# Allegro board MODULATION_CHOISUWON1.brd
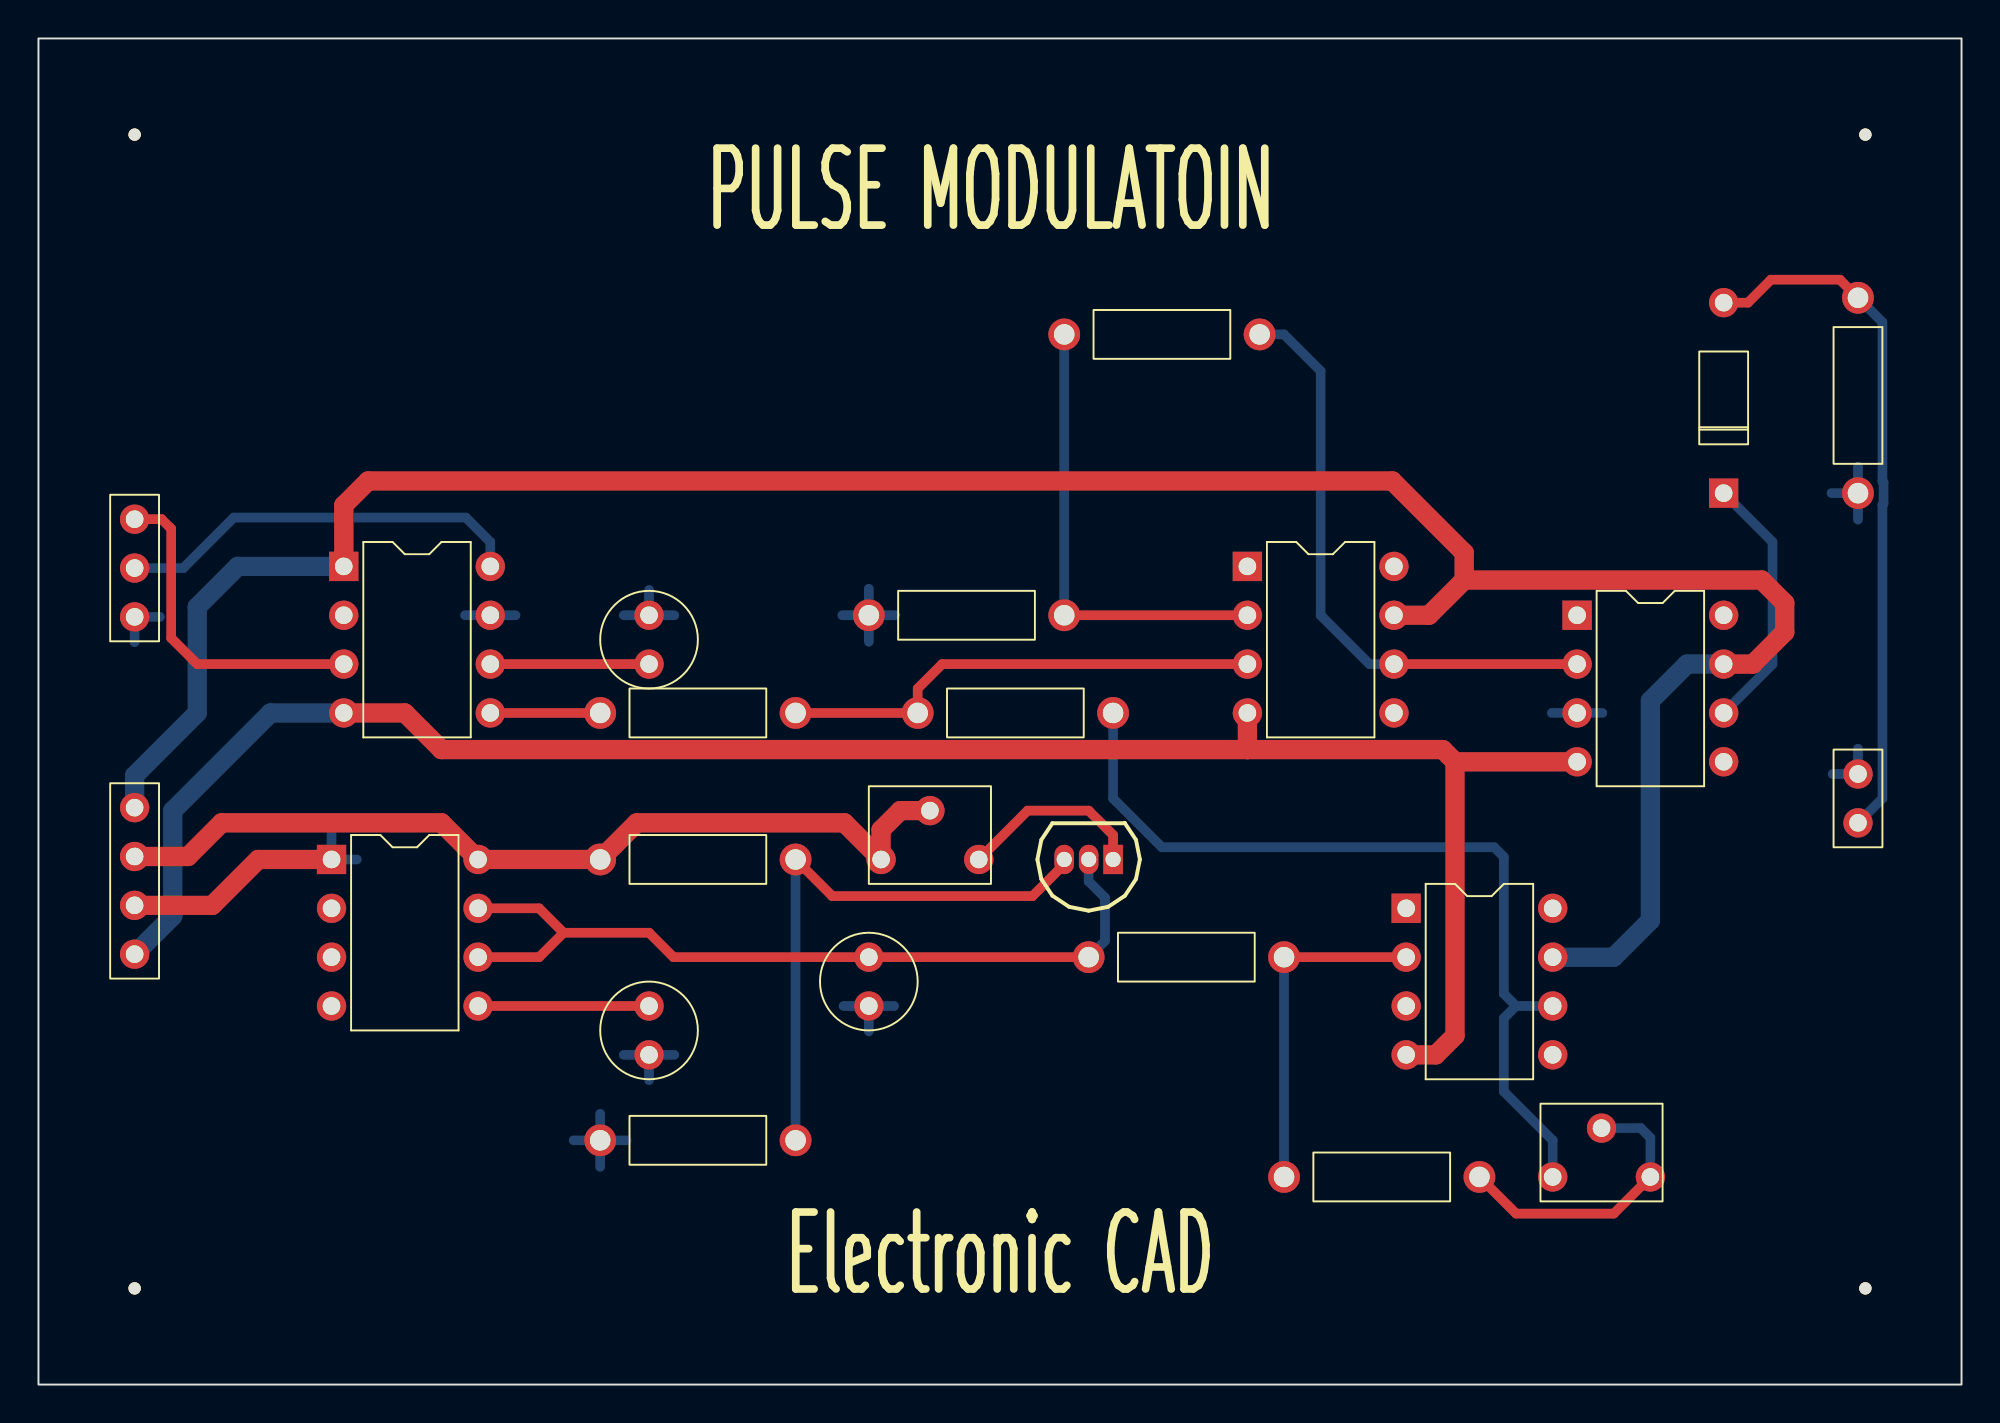
[diagram p0: board, top side]
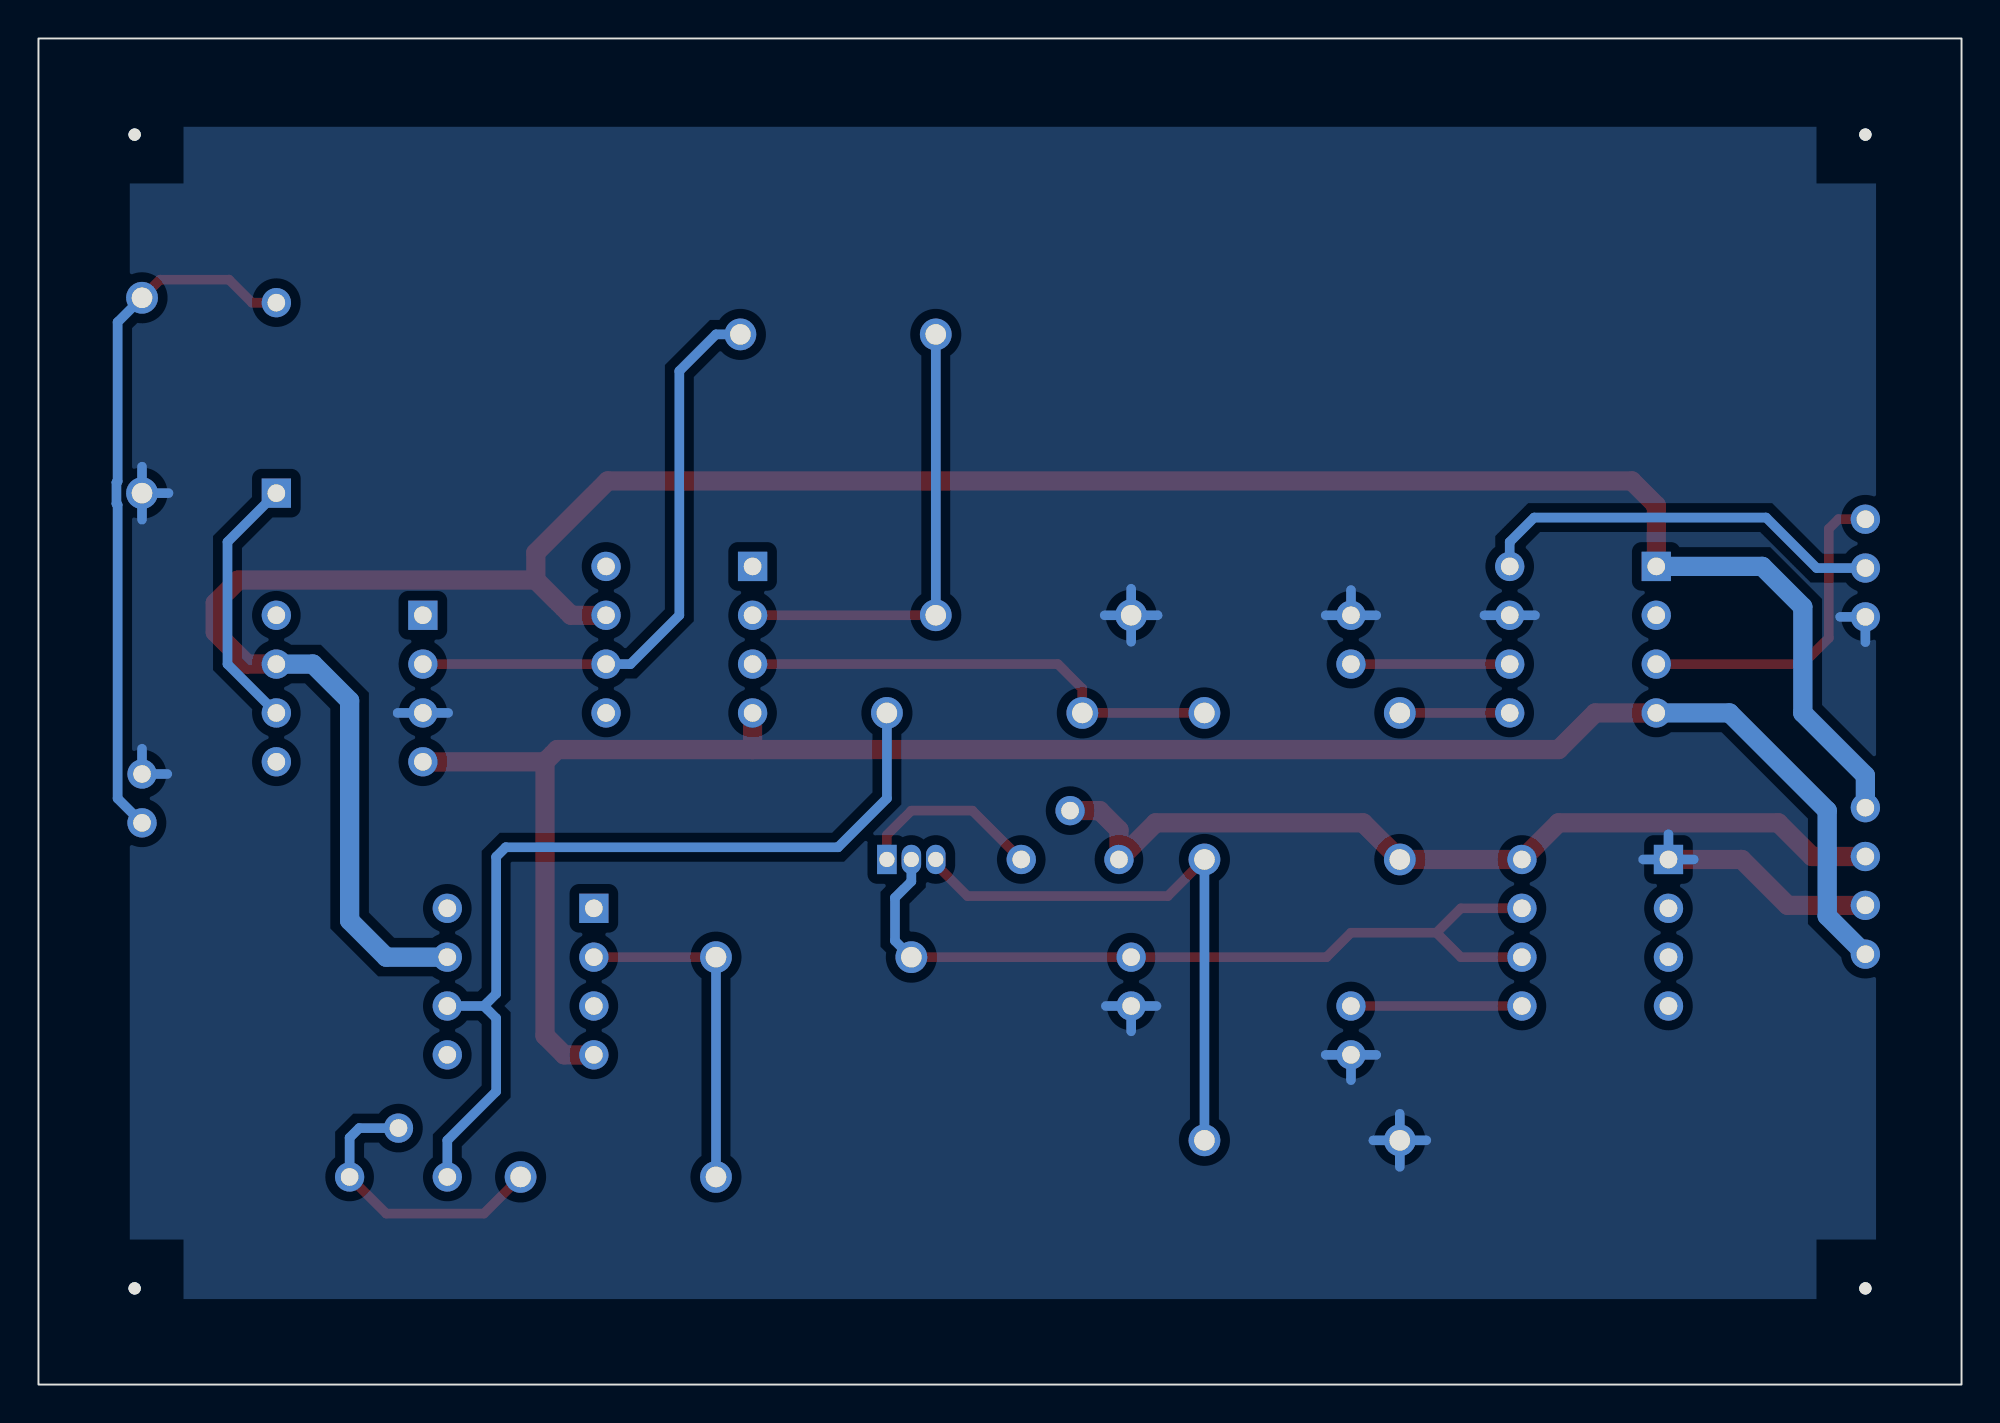
[diagram p1: board, bottom side, seen from below]

Outline 100 x 70 mm; copper layers: TOP, BOTTOM. Coordinates in mm from the lower left corner of the outline.
Outline path: rectangle 0,0 100,70

## Design rules (mm)
constraint set DEFAULT: min track width 0.5

## Placement (name value [footprint] x y rotation side)
C1  0.01uF  [CAP196]  31.75 17.14 0 top
C2  0.01uF  [CAP196]  43.18 19.68 0 top
C3  0.01uF  [CAP196]  31.75 40.01 180 top
D1  d  [DO41]  87.63 46.35 0 top
J1  CON4  [JUMPER4]  5 30 270 top
J2  CON2  [JUMPER2]  94.61 29.21 90 top
J3  CON3  [JUMPER3]  5 45 270 top
NOREF  -  [unnamed]  95 65 0 top
NOREF#2  -  [unnamed]  5 5 0 top
NOREF#3  -  [#2]  0 70 0 top
NOREF#4  -  [#2]  100 0 90 top
NOREF#5  -  [unnamed]  95 5 0 top
NOREF#6  -  [unnamed]  5 65 0 top
Q1  Q2SA1015  [TO92]  55.88 27.3 180 top
R1  30K  [RES400]  29.21 27.3 270 top
R2  100K  [RES400]  39.37 12.7 90 top
R3  6.2K  [RES400]  54.61 22.23 270 top
R4  560  [RES400]  64.77 10.79 270 top
R5  10K  [RES400]  29.21 34.92 270 top
R6  10K  [RES400]  55.88 34.92 90 top
R7  10K  [RES400]  43.18 40.01 270 top
R8  10K  [RES400]  53.34 54.61 270 top
R9  10K  [RES400]  94.61 46.35 0 top
U1  NE555  [DIP8_3]  15.24 27.3 0 top
U2  LF356B  [DIP8_3]  71.12 24.77 0 top
U5  LF356B  [DIP8_3]  62.87 42.55 0 top
U6  LF398  [DIP8_3]  15.88 42.55 0 top
U7  LF356B  [DIP8_3]  80.01 40.01 0 top
VR1  5K  [RESADJ]  48.9 27.3 270 top
VR2  20K  [RESADJ]  83.82 10.79 270 top

## Library data of the parts
C1-C3 = C: Tolerance: ***; User Part Number: ***
D1 = d_0
J1 = CON4: User Part Number: ***
J2 = CON2: User Part Number: ***
J3 = CON3: User Part Number: ***
Q1 = Q2SA1015
R1-R9 = R: Tolerance: ***; User Part Number: ***
U1 = NE555_0: Tolerance: ***; User Part Number: ***
U2 U5 U7 = LF356B_2: Tolerance: ***; User Part Number: ***
U6 = LF111_0: Tolerance: ***; User Part Number: ***
VR1 VR2 = POT: Tolerance: ***; User Part Number: ***

## Footprints (pads in the part's own frame, mm; a bottom-side part is the same pattern mirrored in y, then rotated)
CAP196
  round 1.524 hole 0.914: 1(0,0) 2(0,2.54)
DIP8_3
  rect 1.524x1.524 hole 0.914: 1(0,0)
  round 1.524 hole 0.914: 2(0,-2.54) 3(0,-5.08) 4(0,-7.62) 5(7.62,-7.62) 6(7.62,-5.08) 7(7.62,-2.54) 8(7.62,0)
DO41
  rect 1.524x1.524 hole 0.914: 1(0,0)
  round 1.524 hole 0.914: 2(0,9.906)
JUMPER2
  round 1.524 hole 0.914: 1(0,0) 2(2.54,0)
JUMPER3
  round 1.524 hole 0.914: 1(0,0) 2(2.54,0) 3(5.08,0)
JUMPER4
  round 1.524 hole 0.914: 1(0,0) 2(2.54,0) 3(5.08,0) 4(7.62,0)
RES400
  round 1.651 hole 1.067: 1(0,0) 2(0,10.16)
RESADJ
  round 1.524 hole 0.914: 1(0,0) 2(-2.54,-2.54) 3(0,-5.08)
TO92
  rect 1.016x1.524 hole 0.787: 1(0,0)
  oval 1.016x1.524 hole 0.787: 2(1.27,0) 3(2.54,0)
unnamed
  round 0.635 hole 3.175 unplated: (0,0)

## Nets
+5V: J1.2 R1.1 U1.8(VCC) VR1.2(WIPER) VR1.3
+15V: J1.1 U2.7 U5.7 U6.1 U7.7
-15V: J1.4 U2.4(V-) U5.4(V-) U6.4(V-) U7.4(V-)
GND: C1.1 C2.1 C3.1 J1.3 J2.2 J3.3 R2.2 R7.1 R9.1 U1.1 U6.7 U7.3
CLOCK: U1.2
SIG_1: R6.1 U2.6 VR2.3
N00584: C1.2 U1.5
N00593: C2.2 Q1.2 R3.1 U1.6 U1.7
N00757: Q1.3 R1.2 R2.1
N01108: Q1.1(E) VR1.1
N01378: R3.2 R4.1 U2.2
N01382: U2.3
N01473: R4.2 VR2.1 VR2.2(WIPER)
N02027: J3.2 U6.8
N02031: J3.1 U6.3
N02115: C3.2 U6.6
N02294: R5.1 U6.5
N02395: R5.2 R6.2 U5.3
N02470: R7.2 R8.1 U5.2
N02573: R8.2 U5.6 U7.2
N03266: D1.2 J2.1 R9.2
N03830: D1.1 U7.6

Pads without a net: U1 3 4; U2 1 5 8; U5 1 5 8; U6 2; U7 1 5 8

## Routing (per net, layer and track width the routed paths; a pad name or vN(x,y) marks a point on that pad's centre or on a via; arc(x,y) is an arc through that point)
+5V: length 46.4
  TOP w1: VR1.2 44.81,29.84 43.81,28.84 VR1.3 41.91,29.21 31.11,29.21 R1.1 U1.8 20.95,29.21 9.53,29.21 7.78,27.46 J1.2
+15V: length 134.1
  TOP w1: U7.7 89.15,37.47 90.81,39.12 90.81,40.64 89.61,41.84 74.14,41.84 ; U6.1 15.88,45.72 17.14,46.99 70.4,46.99 74.14,43.25 74.14,41.84 ; U5.7 72.31,40.01 74.14,41.84
  BOTTOM w1: U2.7 81.92,22.23 83.82,24.13 83.82,35.56 85.73,37.47 U7.7 ; J1.1 5,31.67 8.26,34.92 8.26,40.44 10.36,42.55 U6.1
-15V: length 103.6
  TOP w1: 62.87,33.02 62.87,34.92 ; 62.87,33.02 20.96,33.02 19.05,34.92 15.88,34.92 ; 62.87,33.02 73.03,33.02 73.66,32.38 ; U2.4 72.66,17.14 73.66,18.14 73.66,32.38 ; 73.66,32.38 80.01,32.38
  BOTTOM w1: 15.88,34.92 12.07,34.92 6.99,29.84 6.99,24.36 J1.4
GND: length 52.7
  TOP w1: U1.1 11.43,27.3 9.04,24.92 J1.3
  BOTTOM w0.5: R7.1 43.18,41.38 ; R7.1 44.56,40.01 ; R7.1 43.18,38.63 ; R7.1 41.8,40.01 ; 6.32,39.92 J3.3 5,38.6 ; U1.1 15.24,28.62 ; U1.1 16.55,27.3 ; U1.1 13.93,27.3 ; C1.1 33.06,17.14 ; C1.1 30.43,17.14 ; C1.1 31.75,15.83 ; 30.43,40.01 C3.1 ; C3.1 31.75,41.32 ; C3.1 33.06,40.01 ; 94.61,33.06 J2.2 93.3,31.75 ; 94.61,44.98 R9.1 ; R9.1 94.61,47.73 ; R9.1 93.24,46.35 ; 43.18,18.37 C2.1 ; C2.1 41.87,19.68 ; C2.1 44.49,19.68 ; 22.18,40.01 U6.7 24.81,40.01 ; 81.33,34.92 78.69,34.92 ; 29.21,11.32 R2.2 ; R2.2 27.83,12.7 ; R2.2 29.21,14.08 ; R2.2 30.59,12.7
SIG_1: length 46.2
  BOTTOM w0.5: 76.84,19.68 76.2,19.05 76.2,15.24 78.74,12.7 VR2.3 ; 76.84,19.68 78.74,19.68 ; 76.84,19.68 76.2,20.32 76.2,27.44 75.7,27.94 58.42,27.94 55.88,30.48 R6.1
N00584: length 8.9
  TOP w0.5: U1.5 C1.2
N00593: length 43.6
  TOP w0.5: 27.3,23.5 31.75,23.5 33.02,22.23 C2.2 R3.1 ; 27.3,23.5 26.04,24.77 U1.7 ; 27.3,23.5 26.04,22.23 U1.6
  BOTTOM w0.5: Q1.2 54.61,26.16 55.46,25.31 55.46,23.08 R3.1
N00757: length 30.3
  TOP w0.5: Q1.3 53.34,27.05 51.69,25.4 41.27,25.4 R1.2
  BOTTOM w0.5: R1.2 R2.1
N01108: length 9.8
  TOP w0.5: VR1.1 51.44,29.84 54.61,29.84 55.88,28.57 Q1.1
N01378: length 17.8
  TOP w0.5: R3.2 U2.2
  BOTTOM w0.5: R3.2 R4.1
N01473: length 15.3
  TOP w0.5: VR2.1 81.92,8.89 76.83,8.89 R4.2
  BOTTOM w0.5: VR2.2 83.32,13.34 83.82,12.84 VR2.1
N02027: length 21.4
  BOTTOM w0.5: U6.8 23.5,43.81 22.23,45.09 10.16,45.09 7.54,42.46 J3.2
N02031: length 17.3
  TOP w0.5: U6.3 8.26,37.47 6.9,38.82 6.9,44.5 6.4,45 5,45 J3.1
N02115: length 8.3
  TOP w0.5: C3.2 U6.6
N02294: length 5.7
  TOP w0.5: 23.5,34.92 R5.1
N02395: length 25.3
  TOP w0.5: R5.2 R6.2 45.72,36.2 46.99,37.47 U5.3
N02470: length 24.1
  TOP w0.5: U5.2 R7.2
  BOTTOM w0.5: R8.1 R7.2
N02573: length 31.1
  TOP w0.5: U5.6 U7.2
  BOTTOM w0.5: U5.6 69.22,37.47 66.67,40.01 66.67,52.7 64.77,54.61 R8.2
N03266: length 36.3
  TOP w0.5: D1.2 88.9,56.26 90.09,57.46 93.67,57.46 R9.2
  BOTTOM w0.5: R9.2 95.89,55.24 95.89,46.97 95.94,46.91 95.94,45.8 95.89,45.74 95.89,30.48 J2.1
N03830: length 13.5
  BOTTOM w0.5: 87.63,34.92 90.17,37.47 90.17,43.81 D1.1

## Copper pours and planes (outline as drawn; the poured copper is in the pictures)
GND on BOTTOM: 4.45,65.41 4.45,4.45 95.25,4.45 95.25,65.41 ; 1 cut-out

## Text on the board
Ref Des/Silkscreen Top: PULSE MODULATOIN | Electronic CAD
DEVICE_TYPE_TOP: FIGURE | FINISHED_SIZE | 0.787 | 0.914 | 1.067 | 3.175 | DRILL CHART: TOP to BOTTOM | ALL UNITS ARE IN MILLIMETERS | PLATED | NON-PLATED | QTY | 3 | 63 | 18 | 4
